# Altium PCB P2.PcbDoc
Units mil, origin at the board's own origin, x right, y up, seen from the top; angles counter-clockwise.
Board outline 3630 x 2090 mil, 2 copper layers (Top Layer, Bottom Layer); 133 components, 24 nets, 316 pads, 0 vias.
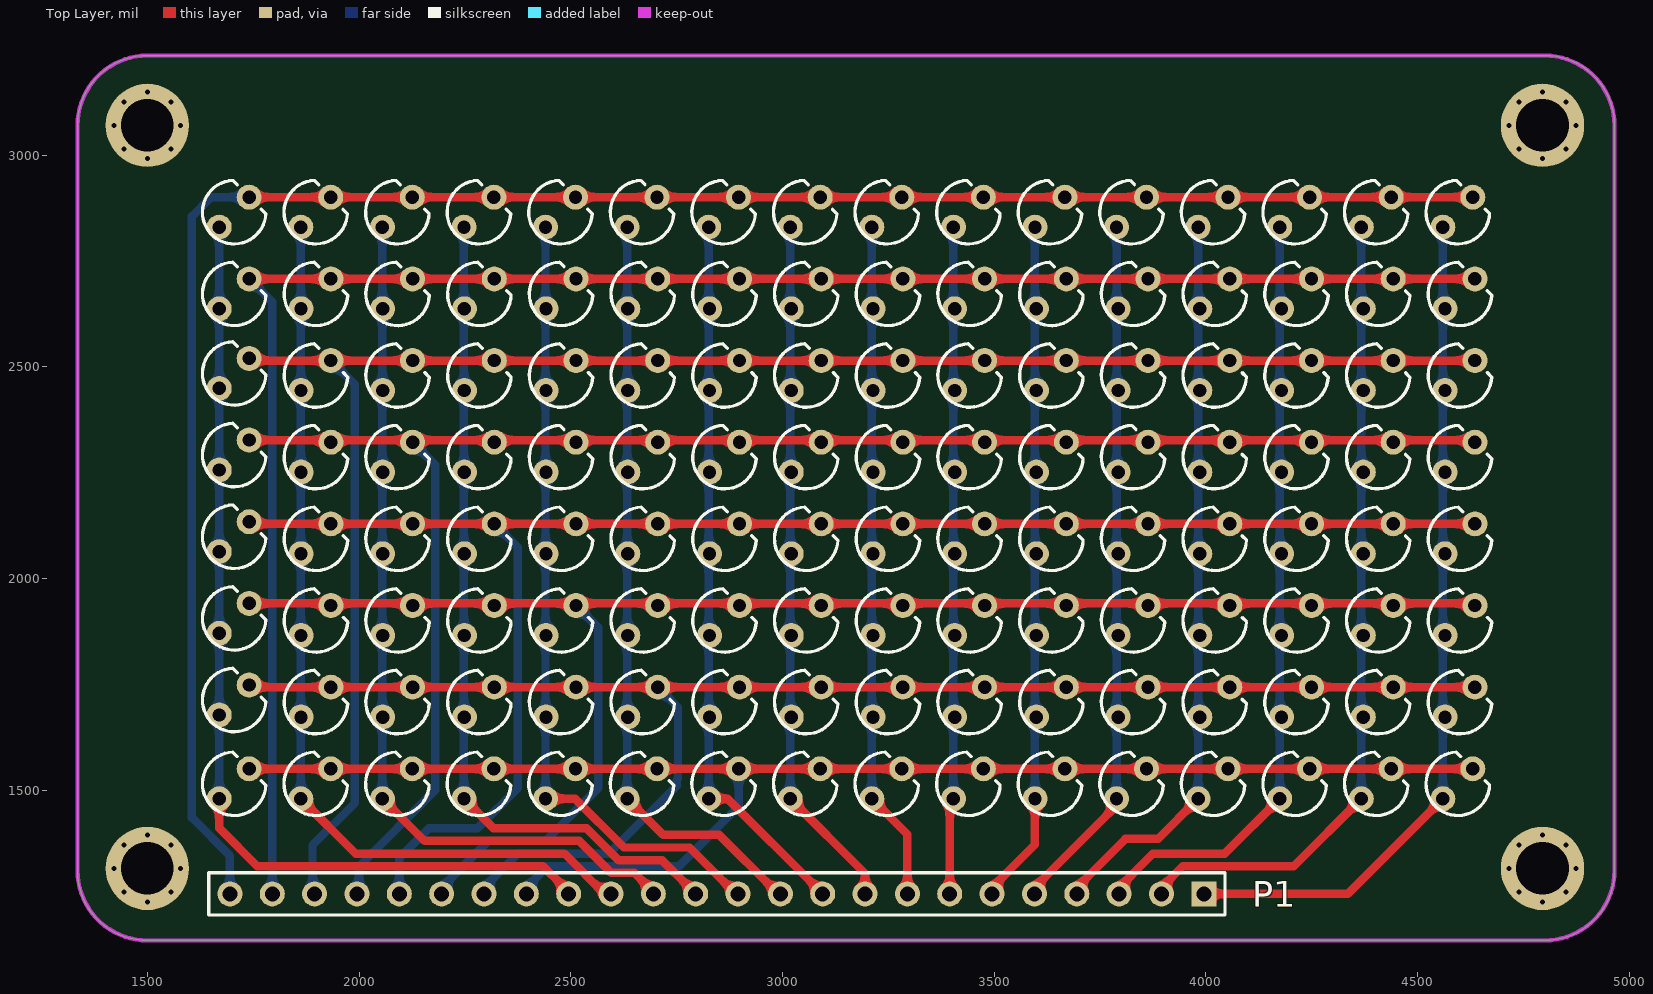
[diagram p0: Top Layer view]
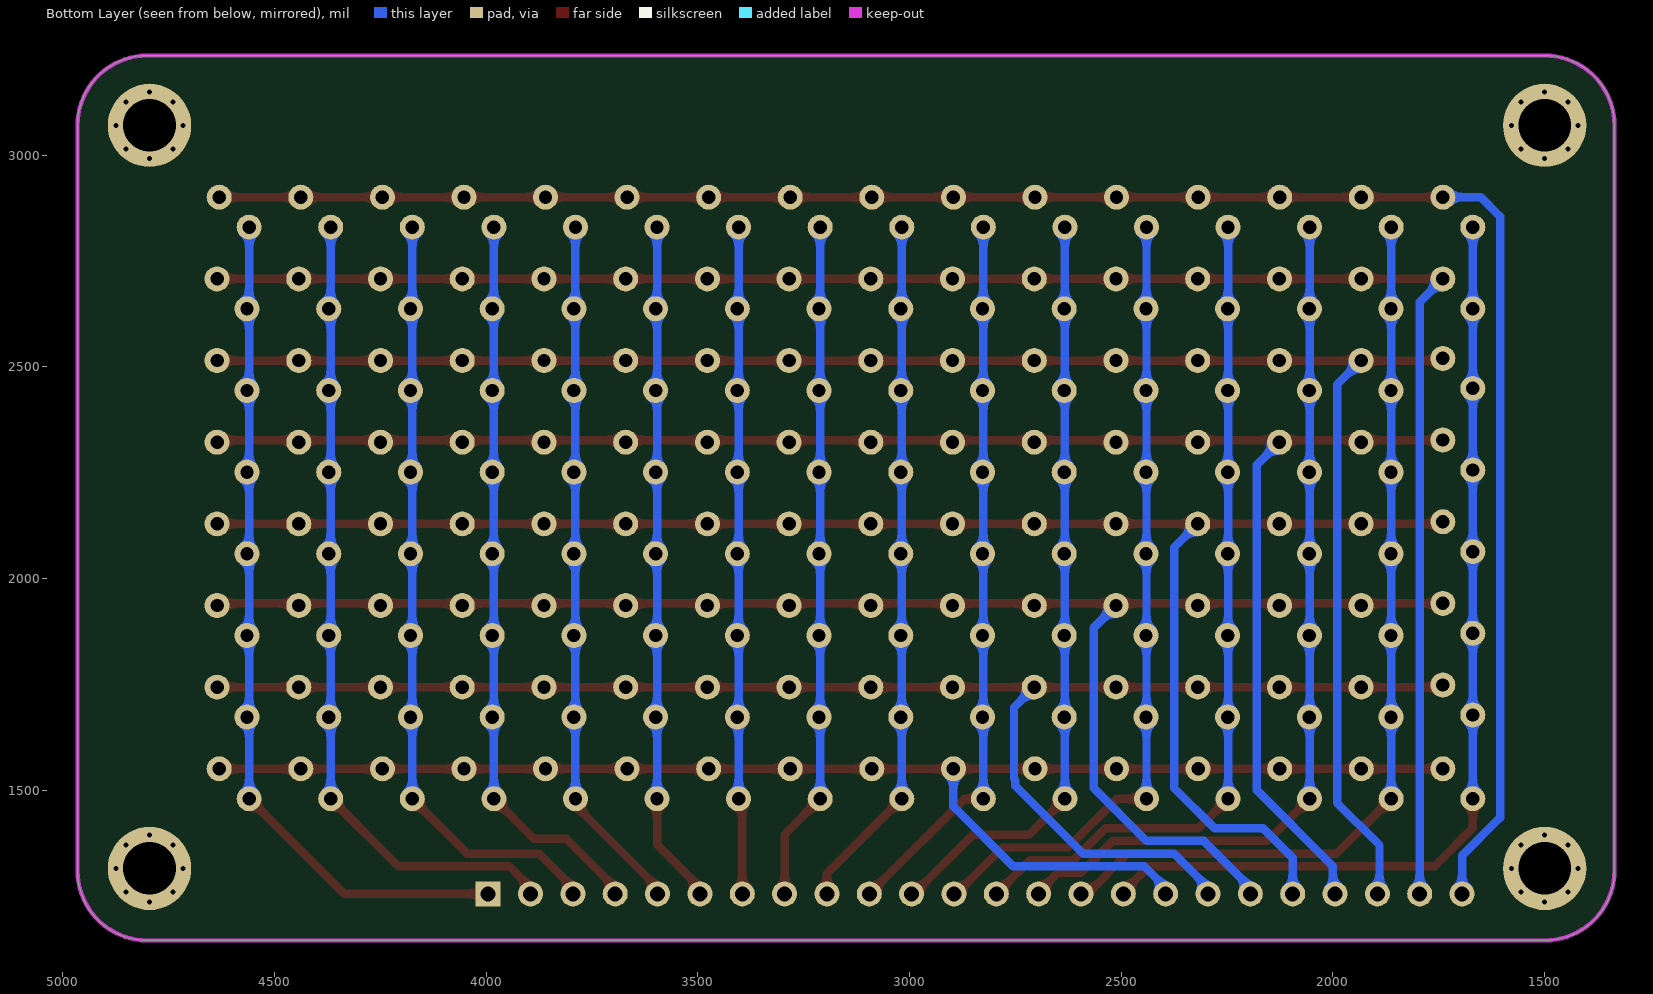
[diagram p1: Bottom Layer view, seen from below]
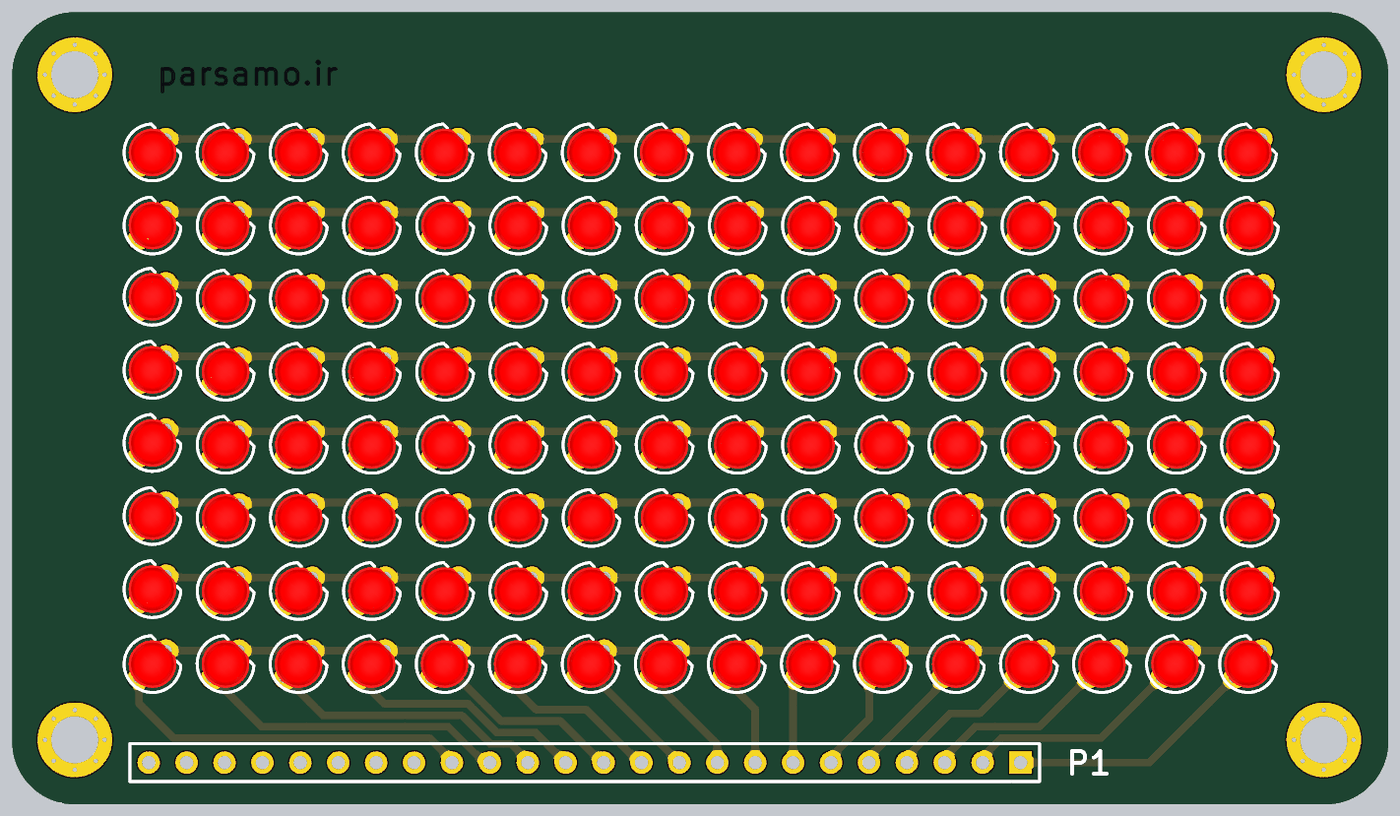
[diagram p2: 3D render of the assembled board from above, using the file's embedded part models]

## Layer stack, top to bottom
Top Solder: solder mask 0.4, Solder Resist, Dk 3.5
Top Layer: signal copper 1.4
Dielectric 1: dielectric 12.6, FR-4, Dk 4.8
Bottom Layer: signal copper 1.4
Bottom Solder: solder mask 0.4, Solder Resist, Dk 3.5

## Board outline
1335,1310 1335,3070 cw(c1500,3070) 1500,3235 4800,3235 cw(c4800,3070) 4965,3070 4965,1310 cw(c4800,1310) 4800,1145 1500,1145 cw(c1500,1310)

## Design rules (kind name [scope] priority, off if disabled: settings)
Clearance [All] p1: gap=10 ignorepadtopadclearanceinfootprint=FALSE except(0: Arc-Hole Track-Hole SMDPad-Hole THPad-Hole Via-Hole Fill-Hole Poly-Hole Region-Hole Text-Hole)
PolygonConnect [All] p1: connectstyle=Relief reliefconductorwidth=10 reliefentries=4 polygonreliefangle="90 Angle" airgapwidth=10
RoutingVias [All] p1: holewidth=28 width=50 viastyle="Through Hole" minholewidth=28 minwidth=50 maxholewidth=28 maxwidth=50
SolderMaskExpansion [All] p1: expansion=4 istentingtop=FALSE
Width [All] p1: maxlimit=20 minlimit=20 preferedwidth=20
30 further rules are at their usual default settings.

## Components (designator, comment, footprint, x,y, rotation, side; value= is the part's Value field where it differs from the comment)
D1 "" "LED Red 3mm TH V" 1705,2865 r45 top
D2 "" "LED Red 3mm TH V" 1705,2672.14 r45 top
D3 "" "LED Red 3mm TH V" 1705,2484.29 r45 top
D4 "" "LED Red 3mm TH V" 1705,2291.43 r45 top
D5 "" "LED Red 3mm TH V" 1705,2098.57 r45 top
D6 "" "LED Red 3mm TH V" 1705,1905.71 r45 top
D7 "" "LED Red 3mm TH V" 1705,1712.86 r45 top
D8 "" "LED Red 3mm TH V" 1705,1515 r45 top
D9 "" "LED Red 3mm TH V" 1897.67,2865 r45 top
D10 "" "LED Red 3mm TH V" 1898,2672.14 r45 top
D11 "" "LED Red 3mm TH V" 1898,2479.29 r45 top
D12 "" "LED Red 3mm TH V" 1898,2286.43 r45 top
D13 "" "LED Red 3mm TH V" 1898,2093.57 r45 top
D14 "" "LED Red 3mm TH V" 1898,1900.71 r45 top
D15 "" "LED Red 3mm TH V" 1898,1707.86 r45 top
D16 "" "LED Red 3mm TH V" 1897.67,1515 r45 top
D17 "" "LED Red 3mm TH V" 2090.33,2865 r45 top
D18 "" "LED Red 3mm TH V" 2091,2672.14 r45 top
D19 "" "LED Red 3mm TH V" 2091,2479.29 r45 top
D20 "" "LED Red 3mm TH V" 2091,2286.43 r45 top
D21 "" "LED Red 3mm TH V" 2091,2093.57 r45 top
D22 "" "LED Red 3mm TH V" 2091,1900.71 r45 top
D23 "" "LED Red 3mm TH V" 2091,1707.86 r45 top
D24 "" "LED Red 3mm TH V" 2090.33,1515 r45 top
D25 "" "LED Red 3mm TH V" 2283,2865 r45 top
D26 "" "LED Red 3mm TH V" 2284,2672.14 r45 top
D27 "" "LED Red 3mm TH V" 2284,2479.29 r45 top
D28 "" "LED Red 3mm TH V" 2284,2286.43 r45 top
D29 "" "LED Red 3mm TH V" 2284,2093.57 r45 top
D30 "" "LED Red 3mm TH V" 2284,1900.71 r45 top
D31 "" "LED Red 3mm TH V" 2284,1707.86 r45 top
D32 "" "LED Red 3mm TH V" 2283,1515 r45 top
D33 "" "LED Red 3mm TH V" 2475.67,2865 r45 top
D34 "" "LED Red 3mm TH V" 2477,2672.14 r45 top
D35 "" "LED Red 3mm TH V" 2477,2479.29 r45 top
D36 "" "LED Red 3mm TH V" 2477,2286.43 r45 top
D37 "" "LED Red 3mm TH V" 2477,2093.57 r45 top
D38 "" "LED Red 3mm TH V" 2477,1900.71 r45 top
D39 "" "LED Red 3mm TH V" 2477,1707.86 r45 top
D40 "" "LED Red 3mm TH V" 2475.67,1515 r45 top
D41 "" "LED Red 3mm TH V" 2668.33,2865 r45 top
D42 "" "LED Red 3mm TH V" 2670,2672.14 r45 top
D43 "" "LED Red 3mm TH V" 2670,2479.29 r45 top
D44 "" "LED Red 3mm TH V" 2670,2286.43 r45 top
D45 "" "LED Red 3mm TH V" 2670,2093.57 r45 top
D46 "" "LED Red 3mm TH V" 2670,1900.71 r45 top
D47 "" "LED Red 3mm TH V" 2670,1707.86 r45 top
D48 "" "LED Red 3mm TH V" 2668.33,1515 r45 top
D49 "" "LED Red 3mm TH V" 2861,2865 r45 top
D50 "" "LED Red 3mm TH V" 2863,2672.14 r45 top
D51 "" "LED Red 3mm TH V" 2863,2479.29 r45 top
D52 "" "LED Red 3mm TH V" 2863,2286.43 r45 top
D53 "" "LED Red 3mm TH V" 2863,2093.57 r45 top
D54 "" "LED Red 3mm TH V" 2863,1900.71 r45 top
D55 "" "LED Red 3mm TH V" 2863,1707.86 r45 top
D56 "" "LED Red 3mm TH V" 2861,1515 r45 top
D57 "" "LED Red 3mm TH V" 3053.67,2865 r45 top
D58 "" "LED Red 3mm TH V" 3056,2672.14 r45 top
D59 "" "LED Red 3mm TH V" 3056,2479.29 r45 top
D60 "" "LED Red 3mm TH V" 3056,2286.43 r45 top
D61 "" "LED Red 3mm TH V" 3056,2093.57 r45 top
D62 "" "LED Red 3mm TH V" 3056,1900.71 r45 top
D63 "" "LED Red 3mm TH V" 3056,1707.86 r45 top
D64 "" "LED Red 3mm TH V" 3053.67,1515 r45 top
D65 "" "LED Red 3mm TH V" 3246.33,2865 r45 top
D66 "" "LED Red 3mm TH V" 3249,2672.14 r45 top
D67 "" "LED Red 3mm TH V" 3249,2479.29 r45 top
D68 "" "LED Red 3mm TH V" 3249,2286.43 r45 top
D69 "" "LED Red 3mm TH V" 3249,2093.57 r45 top
D70 "" "LED Red 3mm TH V" 3249,1900.71 r45 top
D71 "" "LED Red 3mm TH V" 3249,1707.86 r45 top
D72 "" "LED Red 3mm TH V" 3246.33,1515 r45 top
D73 "" "LED Red 3mm TH V" 3439,2865 r45 top
D74 "" "LED Red 3mm TH V" 3442,2672.14 r45 top
D75 "" "LED Red 3mm TH V" 3442,2479.29 r45 top
D76 "" "LED Red 3mm TH V" 3442,2286.43 r45 top
D77 "" "LED Red 3mm TH V" 3442,2093.57 r45 top
D78 "" "LED Red 3mm TH V" 3442,1900.71 r45 top
D79 "" "LED Red 3mm TH V" 3442,1707.86 r45 top
D80 "" "LED Red 3mm TH V" 3439,1515 r45 top
D81 "" "LED Red 3mm TH V" 3631.67,2865 r45 top
D82 "" "LED Red 3mm TH V" 3635,2672.14 r45 top
D83 "" "LED Red 3mm TH V" 3635,2479.29 r45 top
D84 "" "LED Red 3mm TH V" 3635,2286.43 r45 top
D85 "" "LED Red 3mm TH V" 3635,2093.57 r45 top
D86 "" "LED Red 3mm TH V" 3635,1900.71 r45 top
D87 "" "LED Red 3mm TH V" 3635,1707.86 r45 top
D88 "" "LED Red 3mm TH V" 3631.67,1515 r45 top
D89 "" "LED Red 3mm TH V" 3824.33,2865 r45 top
D90 "" "LED Red 3mm TH V" 3828,2672.14 r45 top
D91 "" "LED Red 3mm TH V" 3828,2479.29 r45 top
D92 "" "LED Red 3mm TH V" 3828,2286.43 r45 top
D93 "" "LED Red 3mm TH V" 3828,2093.57 r45 top
D94 "" "LED Red 3mm TH V" 3828,1900.71 r45 top
D95 "" "LED Red 3mm TH V" 3828,1707.86 r45 top
D96 "" "LED Red 3mm TH V" 3824.33,1515 r45 top
D97 "" "LED Red 3mm TH V" 4017,2865 r45 top
D98 "" "LED Red 3mm TH V" 4021,2672.14 r45 top
D99 "" "LED Red 3mm TH V" 4021,2479.29 r45 top
D100 "" "LED Red 3mm TH V" 4021,2286.43 r45 top
D101 "" "LED Red 3mm TH V" 4021,2093.57 r45 top
D102 "" "LED Red 3mm TH V" 4021,1900.71 r45 top
D103 "" "LED Red 3mm TH V" 4021,1707.86 r45 top
D104 "" "LED Red 3mm TH V" 4017,1515 r45 top
D105 "" "LED Red 3mm TH V" 4209.67,2865 r45 top
D106 "" "LED Red 3mm TH V" 4214,2672.14 r45 top
D107 "" "LED Red 3mm TH V" 4214,2479.29 r45 top
D108 "" "LED Red 3mm TH V" 4214,2286.43 r45 top
D109 "" "LED Red 3mm TH V" 4214,2093.57 r45 top
D110 "" "LED Red 3mm TH V" 4214,1900.71 r45 top
D111 "" "LED Red 3mm TH V" 4214,1707.86 r45 top
D112 "" "LED Red 3mm TH V" 4209.67,1515 r45 top
D113 "" "LED Red 3mm TH V" 4402.33,2865 r45 top
D114 "" "LED Red 3mm TH V" 4407,2672.14 r45 top
D115 "" "LED Red 3mm TH V" 4407,2479.29 r45 top
D116 "" "LED Red 3mm TH V" 4407,2286.43 r45 top
D117 "" "LED Red 3mm TH V" 4407,2093.57 r45 top
D118 "" "LED Red 3mm TH V" 4407,1900.71 r45 top
D119 "" "LED Red 3mm TH V" 4407,1707.86 r45 top
D120 "" "LED Red 3mm TH V" 4402.33,1515 r45 top
D121 "" "LED Red 3mm TH V" 4595,2865 r45 top
D122 "" "LED Red 3mm TH V" 4600,2672.14 r45 top
D123 "" "LED Red 3mm TH V" 4600,2479.29 r45 top
D124 "" "LED Red 3mm TH V" 4600,2286.43 r45 top
D125 "" "LED Red 3mm TH V" 4600,2093.57 r45 top
D126 "" "LED Red 3mm TH V" 4600,1900.71 r45 top
D127 "" "LED Red 3mm TH V" 4600,1707.86 r45 top
D128 "" "LED Red 3mm TH V" 4595,1515 r45 top
P1 "Header 24" HDR1X24 3995,1255 r180 top
? "Comment" "Board Screw_No Silk" 1500,1315 r0 top
? "Comment" "Board Screw_No Silk" 1500,3070 r0 top
? "Comment" "Board Screw_No Silk" 4795,3070 r0 top
? "Comment" "Board Screw_No Silk" 4795,1315 r0 top

## Footprints (in the part's own frame and the unit in brackets; to place one, negate y for a bottom-side part, rotate by r counter-clockwise, add the part's x,y. Pads: shape width x height; smd on the part's side, far side on the other; paste and mask are expansions set on the pad)
"Board Screw_No Silk" [mm]
  round 0.6 hole 0.3: S(-2,0) S(-1.414,-1.414) S(-1.414,1.414) S(0,-2) S(0,2) S(1.414,-1.414) S(1.414,1.414) S(2,0)
  round 5 hole 3.15 mask+0.1: S(0,0)
HDR1X24 [mm] "Connector; Header; 24 Position"
  rect 1.5x1.5 hole 0.9: 1(0,0)
  round 1.5 hole 0.9: 2(2.54,0) 3(5.08,0) 4(7.62,0) 5(10.16,0) 6(12.7,0) 7(15.24,0) 8(17.78,0) 9(20.32,0) 10(22.86,0) 11(25.4,0) 12(27.94,0) 13(30.48,0) 14(33.02,0) 15(35.56,0) 16(38.1,0) 17(40.64,0) 18(43.18,0) 19(45.72,0) 20(48.26,0) 21(50.8,0) 22(53.34,0) 23(55.88,0) 24(58.42,0)
  silkscreen extent -1.27,-1.27 59.69,1.27
"LED Red 3mm TH V" [mm] "LED Red 3mm TH V"
  round 1.5 hole 0.8: 1(1.27,0) 2(-1.27,0)
  silkscreen extent -1.9,-1.9 1.28,1.9, body extent -1.6,-1.6 1.5,1.6, height 6.6

## Part data
D1 D2 D3 D4 D5 D6 D7 D8 D9 D10 D11 D12 D13 D14 D15 D16 D17 D18 D19 D20 D21 D22 D23 D24 D25 D26 D27 D28 D29 D30 D31 D32 D33 D34 D35 D36 D37 D38 D39 D40 D41 D42 D43 D44 D45 D46 D47 D48 D49 D50 D51 D52 D53 D54 D55 D56 D57 D58 D59 D60 D61 D62 D63 D64 D65 D66 D67 D68 D69 D70 D71 D72 D73 D74 D75 D76 D77 D78 D79 D80 D81 D82 D83 D84 D85 D86 D87 D88 D89 D90 D91 D92 D93 D94 D95 D96 D97 D98 D99 D100 D101 D102 D103 D104 D105 D106 D107 D108 D109 D110 D111 D112 D113 D114 D115 D116 D117 D118 D119 D120 D121 D122 D123 D124 D125 D126 D127 D128: library part "LED Red", "LED Red"
P1: "Header, 24-Pin"

## Nets (pads, with @x,y where several pads share a name; then routed paths per layer and width w, separated by ;. In a path a pad name is that pad's centre, name@x,y a point inside that pad or via, vN(x,y) a via of type N, cw(c..) or ccw(c..) an arc to the next point about the centre after c; other vN are vias at no path point)
NetD1_1: D1.1 D9.1 D17.1 D25.1 D33.1 D41.1 D49.1 D57.1 D65.1 D73.1 D81.1 D89.1 D97.1 D105.1 D113.1 D121.1 P1.24 | length 4687.6
  Top Layer w20: D1.1 D17.1 D81.1 D121.1
  Bottom Layer w20: P1.24@1680,1255 1695,1270 1695,1345 1605,1435 1605,2855 1650.36,2900.36 D1.1
NetD1_2: D1.2 D2.2 D3.2 D4.2 D5.2 D6.2 D7.2 D8.2 P1.16 | length 2305.7
  Top Layer w20: D8.2 1669.64,1410.36 1760,1320 2435,1320 2480,1275 P1.16@2480,1255
  Bottom Layer w20: D8.2 D7.2 D6.2 D5.2 D4.2 D3.2 D1.2
NetD2_1: D2.1 D10.1 D18.1 D26.1 D34.1 D42.1 D50.1 D58.1 D66.1 D74.1 D82.1 D90.1 D98.1 D106.1 D114.1 D122.1 P1.23 | length 4376.3
  Top Layer w20: D2.1 D10.1 D18.1 D26.1 D34.1 D42.1 D50.1 D58.1 D66.1 D74.1 D82.1 D90.1 D98.1 D106.1 D114.1 D122.1
  Bottom Layer w20: D2.1 1795,2652.85 1795,1270 P1.23@1780,1255
NetD3_1: D3.1 D11.1 D19.1 D27.1 D35.1 D43.1 D51.1 D59.1 D67.1 D75.1 D83.1 D91.1 D99.1 D107.1 D115.1 D123.1 P1.22 | length 4225.7
  Top Layer w20: D3.1 1745.36,2514.64 D11.1 D19.1 D27.1 D35.1 D43.1 D51.1 D59.1 D75.1 D83.1 D91.1 D99.1 D107.1 D115.1 D123.1
  Bottom Layer w20: P1.22@1880,1255 1890,1265 1890,1370 1990,1470 1990,2458 D11.1
NetD4_1: D4.1 D12.1 D20.1 D28.1 D36.1 D44.1 D52.1 D60.1 D68.1 D76.1 D84.1 D92.1 D100.1 D108.1 D116.1 D124.1 P1.21 | length 4068.9
  Top Layer w20: D4.1 4630.35,2326.78 D124.1
  Bottom Layer w20: P1.21@1980,1255 2000,1275 2000,1320 2180,1500 2180,2268.14 D20.1
NetD5_1: D5.1 D13.1 D21.1 D29.1 D37.1 D45.1 D53.1 D61.1 D69.1 D77.1 D85.1 D93.1 D101.1 D109.1 D117.1 D125.1 P1.20 | length 3983.6
  Top Layer w20: D5.1 1745.36,2128.93 D77.1 D125.1
  Bottom Layer w20: P1.20@2080,1255 2095,1270 2095,1340 2165,1410 2280,1410 2375,1505 2375,2073.28 D29.1
NetD6_1: D6.1 D14.1 D22.1 D30.1 D38.1 D46.1 D54.1 D62.1 D70.1 D78.1 D86.1 D94.1 D102.1 D110.1 D118.1 D126.1 P1.19 | length 3838.5
  Top Layer w20: D6.1 4630.35,1941.07 D126.1
  Bottom Layer w20: P1.19@2180,1255 2305,1380 2440,1380 2565,1505 2565,1883.42 D38.1
NetD7_1: D7.1 D15.1 D23.1 D31.1 D39.1 D47.1 D55.1 D63.1 D71.1 D79.1 D87.1 D95.1 D103.1 D111.1 D119.1 D127.1 P1.18 | length 3727.1
  Top Layer w20: D7.1 1745.36,1743.21 D15.1 D23.1 D31.1 D47.1 D55.1 D63.1 D71.1 D79.1 D87.1 D95.1 D111.1 D119.1 D127.1
  Bottom Layer w20: P1.18@2280,1255 2375,1350 2590,1350 2750,1510 2750,1523.41 2753.22,1526.62 2753.22,1695.35 D47.1
NetD8_1: D8.1 D16.1 D24.1 D32.1 D40.1 D48.1 D56.1 D64.1 D72.1 D80.1 D88.1 D96.1 D104.1 D112.1 D120.1 D128.1 P1.17 | length 3580.8
  Top Layer w20: D8.1 D16.1 D24.1 D32.1 D48.1 D56.1 D64.1 D72.1 D80.1 D88.1 D96.1 D104.1 D120.1 D128.1
  Bottom Layer w20: P1.17@2380,1255 2445,1320 2755,1320 2896.35,1461.35 D56.1
NetD9_2: D9.2 D10.2 D11.2 D12.2 D13.2 D14.2 D15.2 D16.2 P1.15 | length 2160.7
  Top Layer w20: D16.2 1991.96,1350 2485,1350 P1.15@2580,1255
  Bottom Layer w20: D16.2 D9.2
NetD17_2: D17.2 D18.2 D19.2 D20.2 D21.2 D22.2 D23.2 D24.2 P1.14 | length 2079.8
  Top Layer w20: D24.2 2154.62,1380 2520,1380 2595.47,1304.53 2650.47,1304.53 2680,1275 P1.14@2680,1255
  Bottom Layer w20: D24.2 D17.2
NetD25_2: D25.2 D26.2 D27.2 D28.2 D29.2 D30.2 D31.2 D32.2 P1.13 | length 1984.2
  Top Layer w20: D32.2 2317.29,1410 2537.47,1410 2612.94,1334.53 2715.47,1334.53 2780,1270 P1.13@2780,1255
  Bottom Layer w20: D32.2 D25.2
NetD33_2: D33.2 D34.2 D35.2 D36.2 D37.2 D38.2 D39.2 D40.2 P1.12 | length 1888.6
  Top Layer w20: D40.2 2510.36,1479.64 2625.47,1364.53 2780.47,1364.53 2880,1265 P1.12@2880,1255
  Bottom Layer w20: D40.2 D33.2
NetD41_2: D41.2 D42.2 D43.2 D44.2 D45.2 D46.2 D47.2 D48.2 P1.11 | length 1795.9
  Top Layer w20: D48.2 2718.09,1394.53 2850.47,1394.53 2980,1265 P1.11@2980,1255
  Bottom Layer w20: D48.2 D41.2
NetD49_2: D49.2 D50.2 D51.2 D52.2 D53.2 D54.2 D55.2 D56.2 P1.10 | length 1706.2
  Top Layer w20: D56.2 2870.36,1479.64 3080,1270 P1.10@3080,1255
  Bottom Layer w20: D56.2 D49.2
NetD57_2: D57.2 D58.2 D59.2 D60.2 D61.2 D62.2 D63.2 D64.2 P1.9 | length 1654
  Top Layer w20: D64.2 3195,1302.96 3195,1270 P1.9@3180,1255
  Bottom Layer w20: D64.2 D57.2
NetD65_2: D65.2 D66.2 D67.2 D68.2 D69.2 D70.2 D71.2 D72.2 P1.8 | length 1615.7
  Top Layer w20: D72.2 3295,1395.62 3295,1270 P1.8@3280,1255
  Bottom Layer w20: D72.2 D65.2
NetD73_2: D73.2 D74.2 D75.2 D76.2 D77.2 D78.2 D79.2 D80.2 P1.7 | length 1584.4
  Top Layer w20: P1.7@3380,1255 3395,1270 3395,1471 D80.2
  Bottom Layer w20: D80.2 D73.2
NetD81_2: D81.2 D82.2 D83.2 D84.2 D85.2 D86.2 D87.2 D88.2 P1.6 | length 1622.8
  Top Layer w20: P1.6@3480,1255 3596.31,1371.31 D88.2
  Bottom Layer w20: D88.2 D81.2
NetD89_2: D89.2 D90.2 D91.2 D92.2 D93.2 D94.2 D95.2 D96.2 P1.5 | length 1661.2
  Top Layer w20: P1.5@3580,1255 3788.98,1463.98 D96.2
  Bottom Layer w20: D96.2 D89.2
NetD97_2: D97.2 D98.2 D99.2 D100.2 D101.2 D102.2 D103.2 D104.2 P1.4 | length 1744.7
  Top Layer w20: P1.4@3680,1255 3810,1385 3887,1385 D104.2
  Bottom Layer w20: D104.2 D97.2
NetD105_2: D105.2 D106.2 D107.2 D108.2 D109.2 D110.2 D111.2 D112.2 P1.3 | length 1837.4
  Top Layer w20: P1.3@3780,1255 3875,1350 4044.67,1350 D112.2
  Bottom Layer w20: D112.2 D105.2
NetD113_2: D113.2 D114.2 D115.2 D116.2 D117.2 D118.2 D119.2 D120.2 P1.2 | length 1930
  Top Layer w20: P1.2@3880,1255 3945,1320 4207.33,1320 D120.2
  Bottom Layer w20: D120.2 D113.2
NetD121_2: D121.2 D122.2 D123.2 D124.2 D125.2 D126.2 D127.2 D128.2 P1.1 | length 2022.7
  Top Layer w20: P1.1@3980,1255 4335,1255 D128.2
  Bottom Layer w20: D128.2 D121.2
pads on no net: ?.S

## Keep-outs
Keep-Out Layer:
  the board outline again, w10

## Silkscreen, mask and mechanical layers (free items; w line width, h text height)
Top Solder:
  text "parsamo.ir" at 1710,3045 h60